# Altium PCB ATtiny Dev Board(1).PcbDoc
Units mm, origin at the board's own origin, x right, y up, seen from the top; angles counter-clockwise.
Board outline 25.75 x 23.8 mm, 2 copper layers (F.Cu, B.Cu); 21 components, 17 nets, 64 pads, 3 vias.
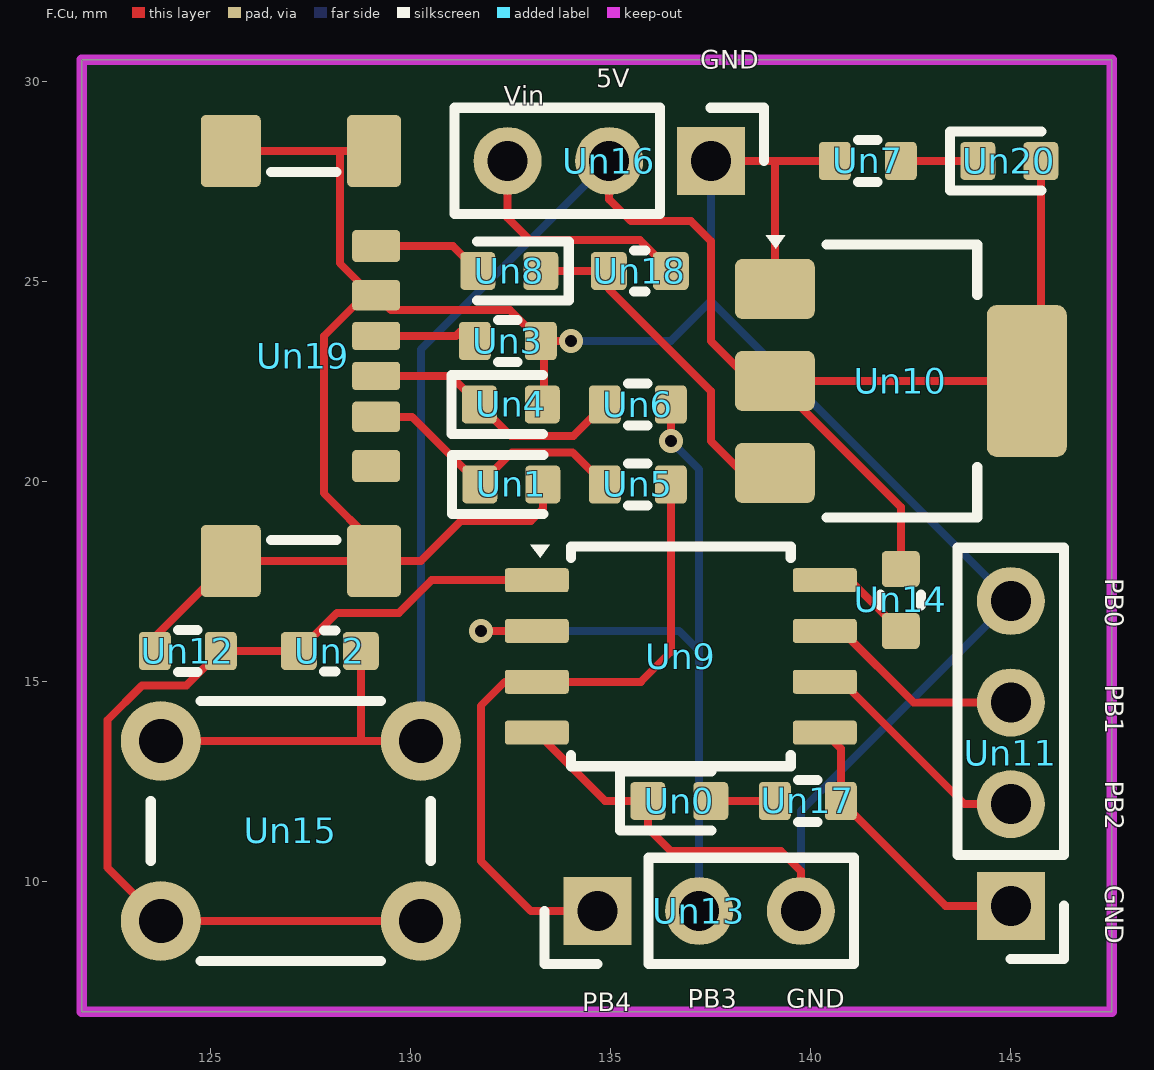
[diagram p0: F.Cu view]
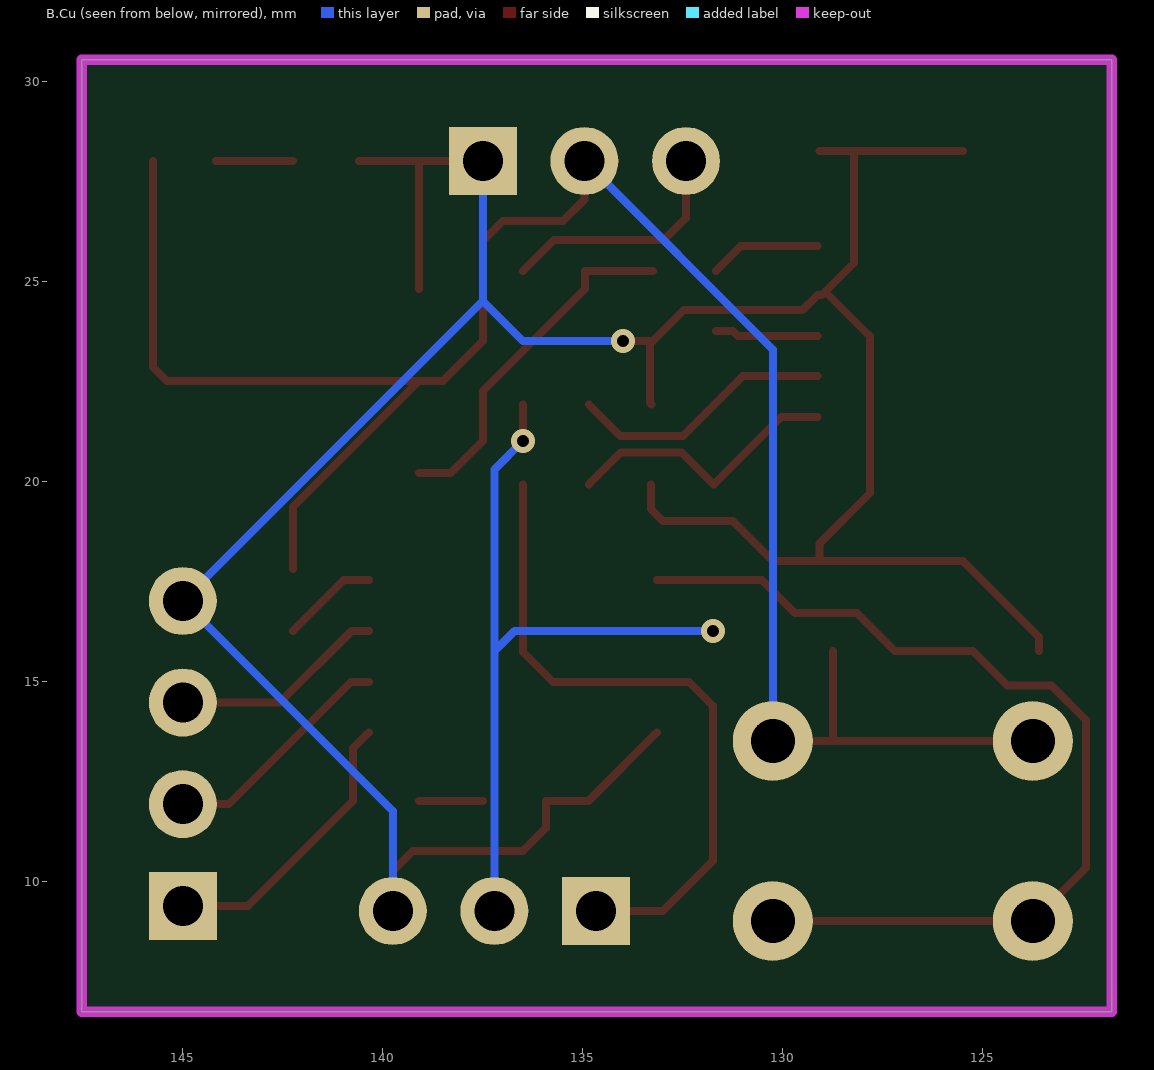
[diagram p1: B.Cu view, seen from below]

## Layer stack, top to bottom
F.Mask: solder mask 0.0102, Solder Resist, Dk 3.5
F.Cu: signal copper 0.0356
Dielectric 1: dielectric 0.32, FR-4, Dk 4.8
B.Cu: signal copper 0.0356
B.Mask: solder mask 0.0102, Solder Resist, Dk 3.5

## Board outline
121.775,30.55 121.775,6.75 147.525,6.75 147.525,30.55 121.775,30.55

## Design rules (kind name [scope] priority, off if disabled: settings)
Clearance [All] p1: gap=0.254 ignorepadtopadclearanceinfootprint=FALSE
MinimumSolderMaskSliver [All] p1: minsoldermaskwidth=0
PolygonConnect [All] p1: connectstyle=Direct reliefconductorwidth=0.254 reliefentries=4 polygonreliefangle="90 Angle" airgapwidth=0.254
RoutingVias [All] p1: holewidth=0.711 width=1.27 viastyle="Through Hole" minholewidth=0.711 minwidth=1.27 maxholewidth=0.711 maxwidth=1.27
SilkToSilkClearance [All] p1: silktosilkclearance=0
SilkToSolderMaskClearance [IsPad] p1: minsilkscreentomaskgap=0 clearancetoexposedcopper=TRUE
SolderMaskExpansion [All] p1: expansion=0.102 istentingtop=FALSE
Width [All] p1: maxlimit=10 minlimit=0.254 preferedwidth=0.254 minimp=50.000000 maximp=50.000000 favimp=50.000000
27 further rules are at their usual default settings.

## Components (designator, comment, footprint, x,y, rotation, side; value= is the part's Value field where it differs from the comment)
Un0 "Comment" LED_0603_1608Metric 136.713,12.02 r0 top value="ONBOARD BLUE LED"
Un1 "Comment" D_0603_1608Metric 132.513,19.933 r0 top value=3.6V
Un2 "Comment" C_0603_1608Metric 127.975,15.77 r0 top value=0.1uF
Un3 "Comment" R_0603_1608Metric 132.425,23.52 r0 top value=5.1kR
Un4 "Comment" D_0603_1608Metric 132.5,21.933 r0 top value=3.6V
Un5 "Comment" R_0603_1608Metric 135.675,19.933 r0 top value=68R
Un6 "Comment" R_0603_1608Metric 135.675,21.933 r0 top value=68R
Un7 "Comment" R_0603_1608Metric 141.425,28.02 r0 top value=220R
Un8 "Comment" D_0603_1608Metric 132.463,25.27 r180 top value=D_Schottky
Un9 "Comment" SOIC-8_5.275x5.275mm_P1.27mm 136.75,15.635 r0 top value=ATtiny85-20S
Un10 "Comment" SOT-223-3_TabPin2 142.25,22.52 r0 top value=AMS1117
Un11 "Comment" PinHeader_1x04_P2.54mm_Vertical 145,9.4 r180 top value=Conn_01x04
Un12 "Comment" R_0603_1608Metric 124.425,15.77 r180 top value=10kR
Un13 "Comment" PinHeader_1x03_P2.54mm_Vertical 134.67,9.27 r90 top value=Conn_01x03
Un14 "Comment" C_0603_1608Metric 142.25,17.045 r90 top value=0.1uF
Un15 "Comment" SW_PUSH_6mm_H4.3mm 130.25,9.02 r180 top value=RESET
Un16 "Comment" PinHeader_1x03_P2.54mm_Vertical 137.5,28.02 r270 top value=Conn_01x03
Un17 "Comment" R_0603_1608Metric 139.925,12.02 r180 top value=330R
Un18 "Comment" C_0603_1608Metric 135.725,25.27 r0 top value=10uF
Un19 "Comment" USB_C_Receptacle_GCT_USB4135-GF-A_6P_TopMnt_Horizontal 126.103,23.145 r270 top value=USB_C_Plug_USB2.0
Un20 "Comment" LED_0603_1608Metric 144.962,28.02 r0 top value=LED

## Footprints (in the part's own frame and the unit in brackets; to place one, negate y for a bottom-side part, rotate by r counter-clockwise, add the part's x,y. Pads: shape width x height; smd on the part's side, far side on the other; paste and mask are expansions set on the pad)
C_0603_1608Metric [mm]
  rrect25% 0.9x0.95 smd mask+0: 1(-0.775,0) 2(0.775,0)
  silkscreen extent -0.14,-0.51 0.14,0.51
D_0603_1608Metric [mm]
  rrect25% 0.875x0.95 smd mask+0: 1(-0.787,0) 2(0.787,0)
  silkscreen extent -1.49,-0.73 0.8,0.73
LED_0603_1608Metric [mm]
  rrect25% 0.875x0.95 smd mask+0: 1(-0.787,0) 2(0.787,0)
  silkscreen extent -1.49,-0.73 0.8,0.73
PinHeader_1x03_P2.54mm_Vertical [mm]
  rect 1.7x1.7 hole 1 paste-2539.97 mask+0: 1(0,0)
  rrect100% 1.7x1.7 hole 1 paste-2539.97 mask+0: 2(0,-2.54) 3(0,-5.08)
  silkscreen extent -1.33,-6.41 1.33,1.33
PinHeader_1x04_P2.54mm_Vertical [mm]
  rect 1.7x1.7 hole 1 paste-2539.97 mask+0: 1(0,0)
  rrect100% 1.7x1.7 hole 1 paste-2539.97 mask+0: 2(0,-2.54) 3(0,-5.08) 4(0,-7.62)
  silkscreen extent -1.33,-8.95 1.33,1.33
R_0603_1608Metric [mm]
  rrect25% 0.8x0.95 smd mask+0: 1(-0.825,0) 2(0.825,0)
  silkscreen extent -0.24,-0.52 0.24,0.52
SOIC-8_5.275x5.275mm_P1.27mm [mm]
  rrect25% 1.6x0.6 smd mask+0: 1(-3.6,1.905) 2(-3.6,0.635) 3(-3.6,-0.635) 4(-3.6,-1.905) 5(3.6,-1.905) 6(3.6,-0.635) 7(3.6,0.635) 8(3.6,1.905)
  silkscreen extent -3.76,-2.75 2.75,2.8
SOT-223-3_TabPin2 [mm]
  rrect25% 2x1.5 smd mask+0: 1(-3.15,2.3) 2(-3.15,0) 3(-3.15,-2.3)
  rrect25% 2x3.8 smd mask+0: 2(3.15,0)
  silkscreen extent -3.37,-3.41 1.91,3.64
SW_PUSH_6mm_H4.3mm [mm]
  round 2 hole 1.1 paste-2539.97 mask+0: 1(0,0) 1(6.5,0) 2(0,-4.5) 2(6.5,-4.5)
  silkscreen extent -0.25,-5.5 6.75,1
USB_C_Receptacle_GCT_USB4135-GF-A_6P_TopMnt_Horizontal [mm]
  rrect25% 0.7x1.2 smd mask+0: A5(-0.5,3.033) A7(0.5,3.033)
  rrect25% 0.76x1.2 smd mask+0: A6(1.52,3.033) S1(-1.52,3.033)
  rrect25% 0.8x1.2 smd mask+0: A12(2.75,3.033) B5(-2.75,3.033)
  rrect19% 1.8x1.35 smd mask+0: S1(-5.125,2.977) S1(5.125,2.977)
  rrect17% 1.8x1.5 smd mask+0: S1(-5.125,-0.603) S1(5.125,-0.603)
  silkscreen extent -4.6,0.41 4.6,2.04

## Part data
Un0 Un20: library part LED_0603_1608Metric, "LED SMD 0603 (1608 Metric), square (rectangular) end terminal, IPC_7351 nominal, (Body size source: http://www.tortai-tech.com/upload/download/2011102023233369053.pdf), generated with kicad-footprint-generator", Footprint=LED_SMD:LED_0603_1608Metric, Description="Light emitting diode", ki_fp_filters="LED* LED_SMD:* LED_THT:*"
  Un0: Reference=D4
  Un20: Reference=D3
Un1 Un4 Un8: library part D_0603_1608Metric, "Diode SMD 0603 (1608 Metric), square (rectangular) end terminal, IPC_7351 nominal, (Body size source: http://www.tortai-tech.com/upload/download/2011102023233369053.pdf), generated with kicad-footprint-generator", Footprint=Diode_SMD:D_0603_1608Metric, ki_fp_filters="TO-???* *_Diode_* *SingleDiode* D_*"
  Un1: Reference=D1, Description="Zener diode"
  Un4: Reference=D2, Description="Zener diode"
  Un8: Reference=D5, Description="Schottky diode"
Un2 Un14 Un18: library part C_0603_1608Metric, "Capacitor SMD 0603 (1608 Metric), square (rectangular) end terminal, IPC_7351 nominal, (Body size source: IPC-SM-782 page 76, https://www.pcb-3d.com/wordpress/wp-content/uploads/ipc-sm-782a_amendment_1_and_2.pdf), generated with kicad-footprint-generator", Footprint=Capacitor_SMD:C_0603_1608Metric, Description="Unpolarized capacitor", ki_fp_filters=C_*
  Un2: Reference=C3
  Un14: Reference=C1
  Un18: Reference=C2
Un3 Un5 Un6 Un7 Un12 Un17: library part R_0603_1608Metric, "Resistor SMD 0603 (1608 Metric), square (rectangular) end terminal, IPC_7351 nominal, (Body size source: IPC-SM-782 page 72, https://www.pcb-3d.com/wordpress/wp-content/uploads/ipc-sm-782a_amendment_1_and_2.pdf), generated with kicad-footprint-generator", Footprint=Resistor_SMD:R_0603_1608Metric, Description=Resistor, ki_fp_filters=R_*
  Un3: Reference=R6
  Un5: Reference=R1
  Un6: Reference=R2
  Un7: Reference=R4
  Un12: Reference=R5
  Un17: Reference=R3
Un9: library part SOIC-8_5.275x5.275mm_P1.27mm, "SOIC, 8 Pin (http://ww1.microchip.com/downloads/en/DeviceDoc/20005045C.pdf#page=23), generated with kicad-footprint-generator ipc_gullwing_generator.py", Reference=ATtiny85, Footprint=Package_SO:SOIC-8_5.275x5.275mm_P1.27mm, Datasheet=http://ww1.microchip.com/downloads/en/DeviceDoc/atmel-2586-avr-8-bit-microcontroller-attiny25-attiny45-attiny85_datasheet.pdf, Description="20MHz, 8kB Flash, 512B SRAM, 512B EEPROM, debugWIRE, SOIC-8W", ki_fp_filters=SOIC*5.3x5.3mm*P1.27mm*
Un10: library part SOT-223-3_TabPin2, "module CMS SOT223 4 pins", Reference=U1, Footprint=Package_TO_SOT_SMD:SOT-223-3_TabPin2, Datasheet=http://www.advanced-monolithic.com/pdf/ds1117.pdf, Description="1A Low Dropout regulator, positive, adjustable output, SOT-223", ki_fp_filters=SOT?223*TabPin2*
Un11: library part PinHeader_1x04_P2.54mm_Vertical, "Through hole straight pin header, 1x04, 2.54mm pitch, single row", Reference=J1, Footprint=Connector_PinHeader_2.54mm:PinHeader_1x04_P2.54mm_Vertical, Description="Generic connector, single row, 01x04, script generated (kicad-library-utils/schlib/autogen/connector/)", ki_fp_filters=Connector*:*_1x??_*
Un13 Un16: library part PinHeader_1x03_P2.54mm_Vertical, "Through hole straight pin header, 1x03, 2.54mm pitch, single row", Footprint=Connector_PinHeader_2.54mm:PinHeader_1x03_P2.54mm_Vertical, Description="Generic connector, single row, 01x03, script generated (kicad-library-utils/schlib/autogen/connector/)", ki_fp_filters=Connector*:*_1x??_*
  Un13: Reference=J2
  Un16: Reference=J3
Un15: library part SW_PUSH_6mm_H4.3mm, "tactile push button, 6x6mm e.g. PHAP33xx series, height=4.3mm", Reference=SW1, Footprint=Button_Switch_THT:SW_PUSH_6mm_H4.3mm, Description="Push button switch, generic, two pins"
Un19: library part USB_C_Receptacle_GCT_USB4135-GF-A_6P_TopMnt_Horizontal, "USB Type C Receptacle, GCT, power-only, 6P, top mounted, horizontal, 3A: https://gct.co/files/drawings/usb4135.pdf", Reference=P1, Footprint=Connector_USB:USB_C_Receptacle_GCT_USB4135-GF-A_6P_TopMnt_Horizontal, Datasheet=https://www.usb.org/sites/default/files/documents/usb_type-c.zip, Description="USB 2.0-only Type-C Plug connector", ki_fp_filters=USB*C*Plug*

## Via types
v1: diameter 0.6, hole 0.3, F.Cu to B.Cu, tented both sides, 3 vias

## Nets (pads, with @x,y where several pads share a name; then routed paths per layer and width w, separated by ;. In a path a pad name is that pad's centre, name@x,y a point inside that pad or via, vN(x,y) a via of type N, cw(c..) or ccw(c..) an arc to the next point about the centre after c; other vN are vias at no path point)
5V: Un2.2 Un10.2 Un14.2 Un15.2 Un16.2 Un20.2 | length 51.6
  F.Cu w0.2: Un15.2@123.75,13.52 128.75,13.52 ; Un2.2 128.75,13.52 ; Un15.2@130.25,13.52 128.75,13.52 ; Un16.2 134.96,27.06 135.5,26.52 137,26.52 137.5,26.02 137.5,23.52 138.5,22.52 Un10.2@139.1,22.52 ; Un14.2 142.25,19.37 Un10.2@139.1,22.52 ; Un20.2 145.75,22.87 145.4,22.52 Un10.2@139.1,22.52
  B.Cu w0.2: Un15.2@130.25,13.52 130.25,23.31 Un16.2
B9: Un0.1 Un1.2 Un3.2 Un4.2 Un7.1 Un9.4 Un10.1 Un11.4 Un12.2 Un13.3 Un16.1 Un19.S1 | length 77.9
  F.Cu w0.2: Un12.2 123.6,16.12 125.5,18.02 Un19.S1@129.08,18.02 ; Un19.S1@125.5,28.27 128.225,28.27 ; Un19.S1@129.08,28.27 128.225,28.27 ; Un9.4 134.86,12.02 Un0.1 135.925,11.345 136.5,10.77 139.25,10.77 139.75,10.27 Un13.3 ; Un4.2 133.325,21.97 Un3.2@133.325,23.433 ; Un1.2 133.3,19.32 133,19.02 131.25,19.02 130.25,18.02 Un19.S1@129.08,18.02 ; v1(134,23.52) Un3.2 132.475,24.295 129.505,24.295 129.135,24.665 129.024,24.665 Un19.S1@128.937,24.752 ; Un16.1 139.1,28.02 ; Un10.1 139.1,28.02 ; Un7.1 139.1,28.02 ; 128.225,28.27 128.225,25.463 Un19.S1@128.937,24.752 ; Un19.S1@128.937,24.752 127.825,23.64 127.825,19.715 129.08,18.46 Un19.S1@129.08,18.02
  B.Cu w0.2: v1(134,23.52) 136.5,23.52 137.5,24.52 ; Un16.1 137.5,24.52 ; Un13.3 139.75,11.77 Un11.4 137.5,24.52
Net-(D1-K): Un1.1 Un5.1 Un19.A6 | length 7.1
  F.Cu w0.2: Un19.A6 130.033,21.625 Un1.1 132.526,20.733 134.049,20.733 Un5.1
Net-(D2-K): Un4.1 Un6.1 Un19.A7 | length 6.7
  F.Cu w0.2: Un19.A7 131,22.645 Un4.1 132.5,21.145 134.063,21.145 Un6.1
Net-(D3-K): Un7.2 Un20.1 | length 1.9
  F.Cu w0.2: Un7.2 Un20.1
Net-(D4-A): Un0.2 Un17.2 | length 1.6
  F.Cu w0.2: Un0.2 Un17.2
Net-(D5-A): Un8.2 Un19.B5 | length 2.8
  F.Cu w0.2: Un19.B5 131.05,25.895 Un8.2
Net-(D5-K): Un8.1 Un10.3 Un18.1 | length 8.9
  F.Cu w0.2: Un8.1 Un18.1 134.95,24.82 137.5,22.27 137.5,21.02 138.3,20.22 Un10.3
Net-(J1-Pin_1): Un9.5 Un11.1 Un17.1 | length 7.2
  F.Cu w0.2: Un9.5 140.75,13.33 Un17.1 143.37,9.4 Un11.1
Net-(J1-Pin_2): Un9.6 Un11.2 | length 5.9
  F.Cu w0.2: Un9.6 140.788,15 143.848,11.94 Un11.2
Net-(J1-Pin_3): Un9.7 Un11.3 | length 5.4
  F.Cu w0.2: Un9.7 140.784,16.27 142.573,14.48 Un11.3
Net-(J2-Pin_1): Un5.2 Un9.3 Un13.1 | length 16.8
  F.Cu w0.2: Un13.1 133,9.27 131.75,10.52 131.75,14.4 132.35,15 Un9.3 135.75,15 136.5,15.75 Un5.2
Net-(J2-Pin_2): Un6.2 Un9.2 Un13.2 | length 20
  F.Cu w0.2: v1(131.75,16.27) Un9.2 ; v1(136.5,21.02) Un6.2
  B.Cu w0.2: v1(131.75,16.27) 136.71,16.27 137.21,15.77 ; v1(136.5,21.02) 137.21,20.31 137.21,16.27 137.21,15.77 ; Un13.2 137.21,15.77
Net-(P1-CC): Un3.1 Un19.A5 | length 2.6
  F.Cu w0.2: Un19.A5 131.125,23.645 131.25,23.77 Un3.1@131.675,23.77
Net-(U2-VCC): Un9.8 Un14.1 | length 2.4
  F.Cu w0.2: Un9.8 140.98,17.54 Un14.1
Net-(U2-{\R\E\S\E\T\}\{\s\l\a\s\h\}\P\B\5\)\: Un2.1 Un9.1 Un12.1 Un15.1 | length 24.3
  F.Cu w0.2: Un15.1@130.25,9.02 123.75,9.02 122.413,10.357 122.413,14.039 123.281,14.907 124.387,14.907 Un12.1 Un2.1 128.15,16.72 129.7,16.72 130.52,17.54 Un9.1
Vin: Un16.3 Un18.2 | length 6.1
  F.Cu w0.2: Un16.3 132.42,26.6 132.975,26.045 135.725,26.045 Un18.2
pads on no net: Un19.A12

## Keep-outs
Edge.Cuts:
  lines w0: 121.775,6.75 147.525,6.75 147.525,30.55 121.775,30.55 121.775,6.75
  lines w0.254: 121.775,6.75 147.525,6.75 147.525,30.55 121.775,30.55 121.775,6.75

## Silkscreen, mask and mechanical layers (free items; w line width, h text height)
F.SilkS:
  text "GND" at 137.235,30.168 h0.8
  text "5V" at 134.642,29.695 h0.8
  text "Vin" at 132.325,29.268 h0.8
  text "PB0" at 147.197,17.585 h0.8 r270
  text "PB1" at 147.204,14.926 h0.8 r270
  text "PB2" at 147.201,12.53 h0.8 r270
  text "GND" at 147.198,9.91 h0.8 r270
  text "GND" at 139.385,6.693 h0.8
  text "PB3" at 136.921,6.692 h0.8
  text "PB4" at 134.286,6.596 h0.8